# Altium PCB RobotBoardPcb.PcbDoc (part 1 of 2)
Units mm, origin at the board's own origin, x right, y up, seen from the top; angles counter-clockwise.
Board outline 64 x 85 mm, 4 copper layers (Top Layer, Ground Plane, Power Plane, Bottom Layer), stack 0.844 mm thick; 128 components, 94 nets, 395 pads, 170 vias.
Unrouted connection lines stored in the file: 5.
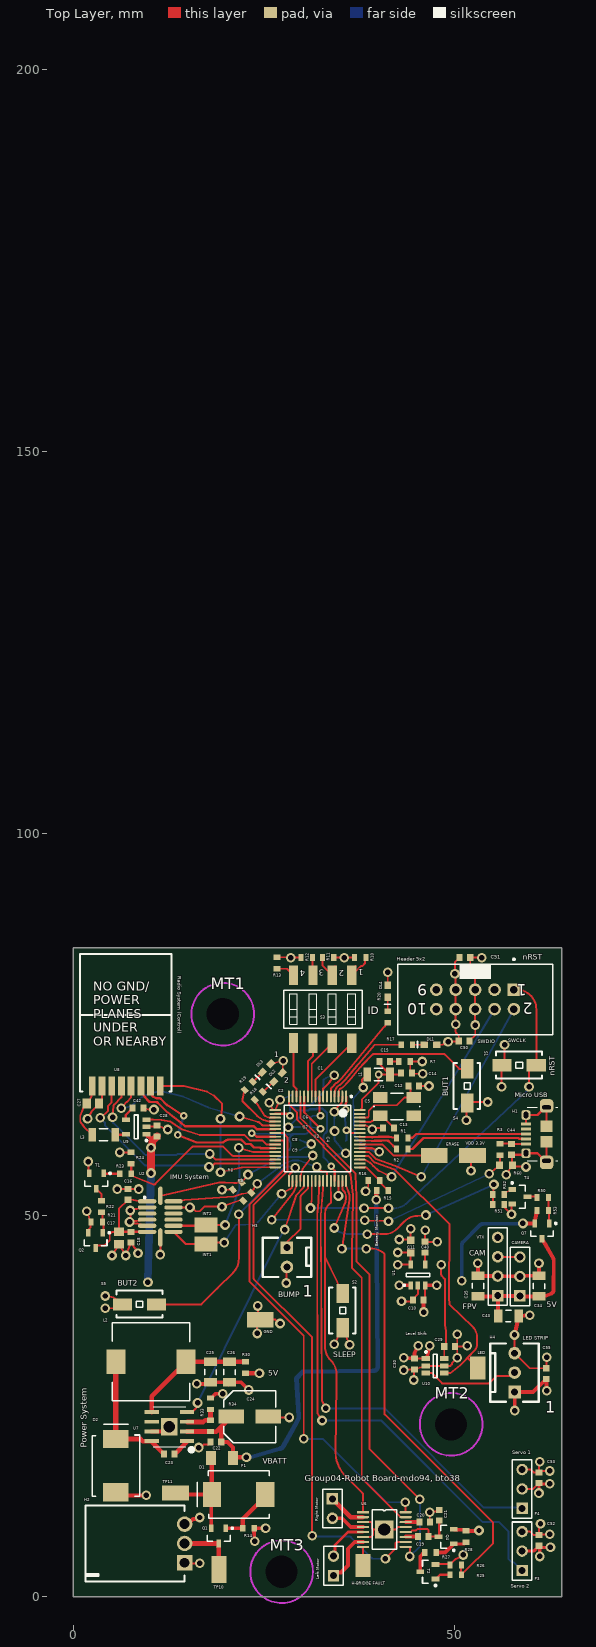
[diagram p0: Top Layer view]
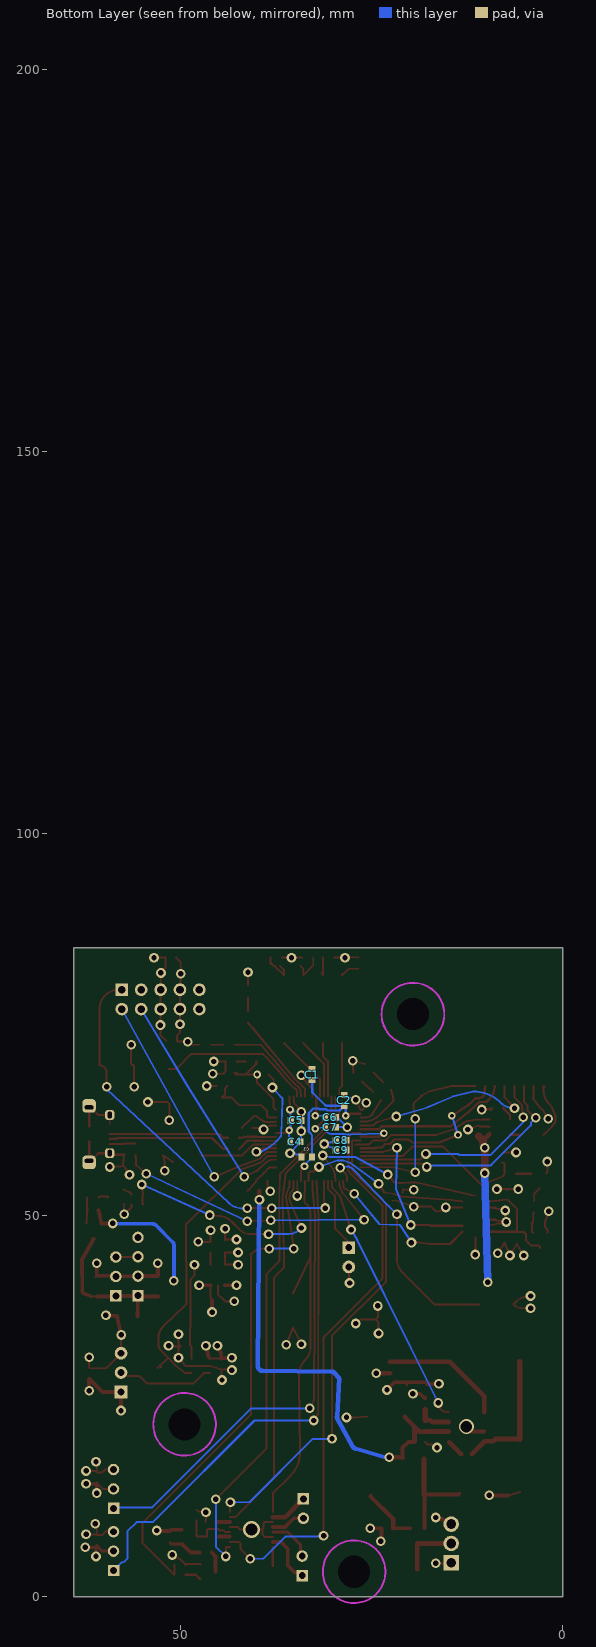
[diagram p1: Bottom Layer view, seen from below]
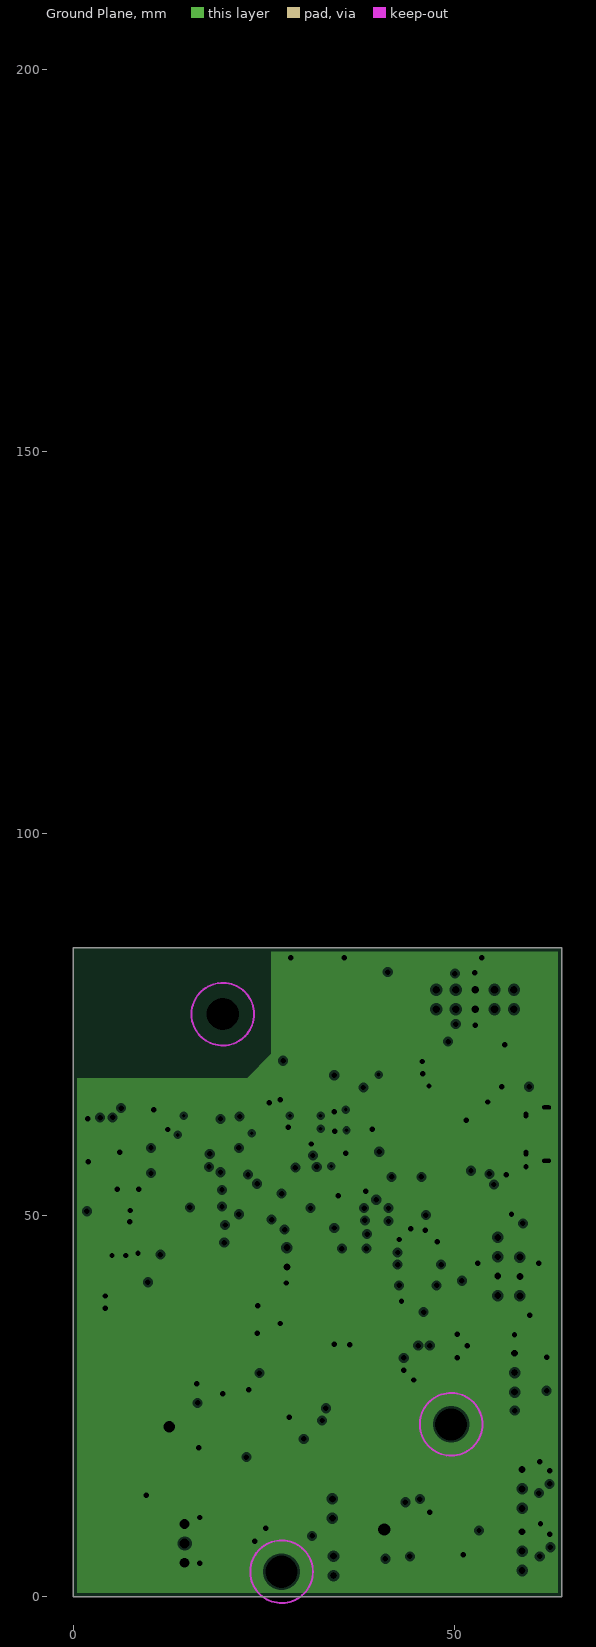
[diagram p2: Ground Plane, clearances drawn from the general rule]
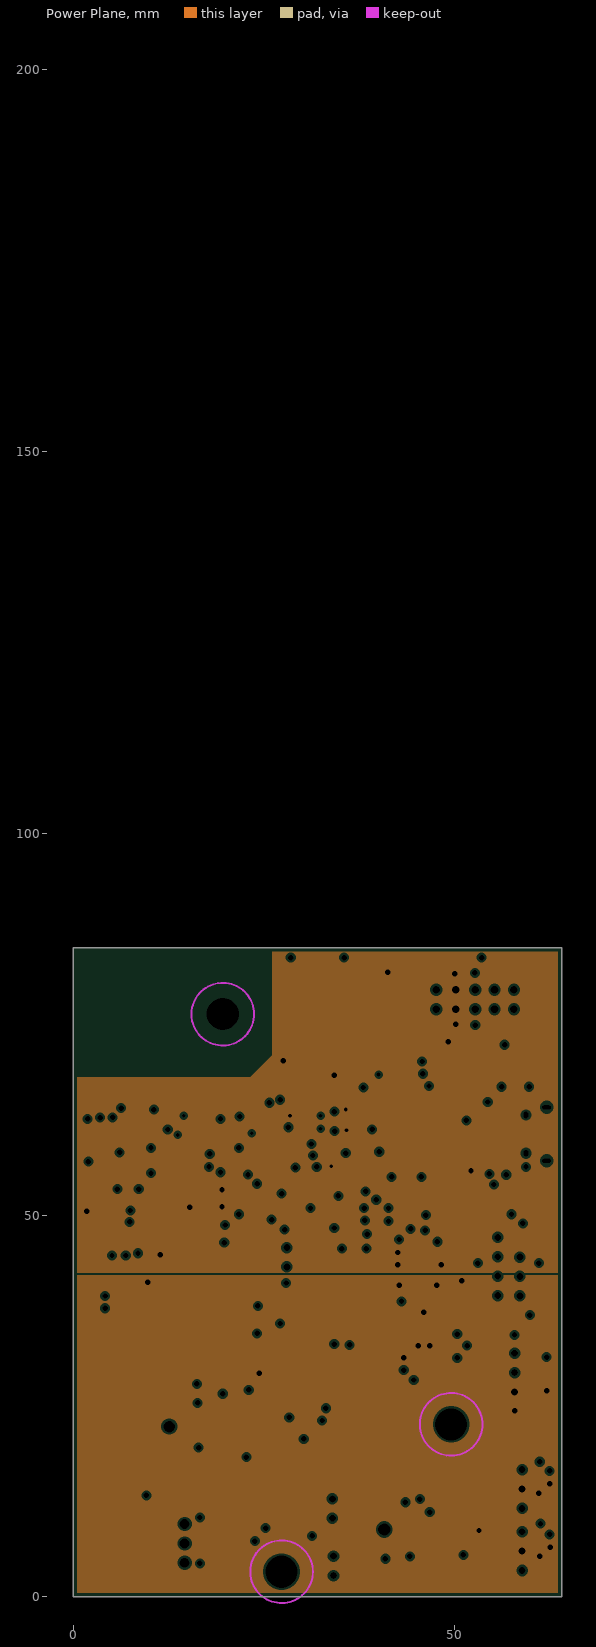
[diagram p3: Power Plane, clearances drawn from the general rule]

## Layer stack, top to bottom
Top Solder: solder mask 0.0102, Solder Resist, Dk 3.5
Top Layer: signal copper 0.0356
Dielectric 1: core 0.32, FR-4, Dk 4.8
Ground Plane: plane copper 0.036, net GND
Dielectric 3: prepreg 0.127, Dk 4.2
Power Plane: plane copper 0.036, net (Multiple Nets)
Dielectric 4: core 0.254, Dk 4.2
Bottom Layer: signal copper 0.0356
Bottom Solder: solder mask 0.0102, Solder Resist, Dk 3.5

## Board outline
0,85 64,85 64,0 0,0 0,85

## Design rules (kind name [scope] priority, off if disabled: settings)
BoardOutlineClearance [All] p1: gap=0.5 ignorepadtopadclearanceinfootprint=FALSE
Clearance GND_POLY [InNamedPolygon('GND')] p1: gap=0.254 ignorepadtopadclearanceinfootprint=FALSE
Clearance Min_Clearance_Circuit_Labs [All] p2: gap=0.2 ignorepadtopadclearanceinfootprint=FALSE
FanoutControl Fanout_BGA [IsBGA] p1 off: bgadir=Out bgaviamode=Centered fanoutstyle=Auto fanoutdirection=Alternating viagrid=0.025 // Fanout_BGA (Default Rule)
Height [All] p1: minheight=0 maxheight=50.8 prefheight=12.7
HoleSize [All] p1: absolutevalues=TRUE maxlimit=10 minlimit=0.3 maxpercent=80.000 minpercent=20.000
MinimumAnnularRing [All] p1: minimumring=0.1
MinimumSolderMaskSliver [All] p1: minsoldermaskwidth=0.102
NetAntennae [All] p1: netantennaetolerance=1
PlaneClearance [All] p1: clearance=0.305
PlaneConnect [All] p1: planeconnectstyle=Direct reliefexpansion=0.508 reliefentries=4 reliefconductorwidth=0.254 reliefairgap=0.254
PolygonConnect [All] p1: connectstyle=Relief reliefconductorwidth=0.254 reliefentries=4 polygonreliefangle="90 Angle" airgapwidth=0.254
RoutingVias [All] p1: holewidth=0.711 width=1.27 viastyle="Through Hole" minholewidth=0.711 minwidth=1.27 maxholewidth=0.711 maxwidth=1.27
SMDNeckDown [All] p1 off: percent=50.000
SMDToCorner [All] p1: distance=98425
SMDToPlane [All] p1: distance=1968504
SilkToSolderMaskClearance SilkscreenOverComponentPads [IsPad] p1: minsilkscreentomaskgap=0.2 clearancetoexposedcopper=TRUE
SolderMaskExpansion [All] p1: expansion=0.102 istentingtop=FALSE
ViasUnderSMD [All] p1: allowed=FALSE
Width [All] p1: maxlimit=0.254 minlimit=0.254 preferedwidth=0.254
22 further rules are at their usual default settings.

## Classes and differential pairs
component class U_RobotPower: C1 C2 C3 C4 C5 C6 C7 C8 C9 C10 C11 C14 C15 C22 C23 C24 C25 C26 C40 D1 D2 F1 H2 L1 L2 Q1 R7 R14 R30 R33 R34 TP10 TP11 U1 U7
component class RobotBoard: C12 C13 C16 C17 C18 C19 C20 C21 C27 C28 C29 C30 C34 C35 C42 C43 C44 C50 C51 C52 C53 C55 CAMERA DL1 DL3 DL4 ERASE GND H1 H3 H4 L3 LED "Left Motor" "Light 1" MT1 MT2 MT3 P3 P4 Q2 Q4 Q7 R1 R2 R3 R8 R9 R10 R11 R12 R13 R15 R16 R17 R19 R20 R21 R22 R23 R24 R25 R26 R27 R28 R50 R51 R52 R53 R60 "Right Motor" S1 S2 S3 S4 S5 T1 T2 T4 U3

## Components (designator, comment, footprint, x,y, rotation, side; value= is the part's Value field where it differs from the comment)
C1 "100nF" CAPC1608L 32.8,68.4 r270 bottom
C2 "100nF" CAPC1608L 28.6,65 r270 bottom
C3 "100nF" CAPC1608L 33.5,57.6 r180 bottom
C4 "100nF" CAPC1608L 35,59.6 r0 bottom
C5 "100nF" CAPC1608L 34.9,62.4 r0 bottom
C6 "100nF" CAPC1608L 30.4,62.8 r180 bottom
C7 "100nF" CAPC1608L 30.4,61.5 r180 bottom
C8 "100nF" CAPC1608L 29,59.8 r0 bottom
C9 "100nF" CAPC1608L 29,58.5 r0 bottom
C10 "1uF" CAPC1608L 45.2,38.9 r180 top
C11 "4.7uF" CAPC1608N 44.2,45.9 r90 top
C12 "27pF" CAPC1608L 44.6,66.9 r180 top
C13 "27pF" CAPC1608L 41.3,61.4 r0 top
C14 "100nF" CAPC1608L 43.654,68.6 r0 top
C15 "4.7nF" CAPC1608L 40.8,70.1 r0 top
C16 "100nF" CAPC1608L 7.2,52.7 r270 top
C17 "10uF" CAPC2012L 6,47 r90 top
C18 "1uF" CAPC1608L 7.6,47.1 r90 top
C19 "10nF" CAPC1608L 45.85,7.9 r0 top
C20 "2.2uF" CAPC1608L 46.05,9.8 r0 top
C21 "10uF" CAPC1608L 47.95,10.7 r270 top
C22 "10uF" CAPC1608L 18.7,20.3 r180 top
C23 "100nF" CAPC1608L 12.6,18.7 r180 top
C24 "100µF/25V" CAPAE6666X77M 23.125,23.6 r0 top
C25 "22uF" CAPC3216L 18,29.45 r270 top
C26 "22uF" CAPC3216L 20.5,29.45 r270 top
C27 "10uF" CAPC2012L 2.6,64.6 r180 top
C28 "1uF" CAPC1608L 11,61 r90 top
C29 "1uF" CAPC1608L 49.3,32.8 r180 top
C30 "1uF" CAPC1608L 44.7,30.5 r90 top
C34 "10uF" CAPC3216L 61,40.7 r270 top
C35 "0.22uF" CAPC3216L 53,40.7 r90 top value=10uF
C40 "10nF" CAPC1608L 46.1,45.8 r270 top value=100nF
C42 "10nF" CAPC1608L 8.5,64 r180 top
C43 "47uF" CAPC3216L 57,36.8 r180 top
C44 "4.7nF" CAPC1608L 57.4,58.6 r90 top
C50 "100nF" CAPC1608L 51.2,72.8 r180 top
C51 "100nF" CAPC1608L 51.3,83.7 r180 top
C52 "100nF" CAPC1608L 61,7.4 r270 top
C53 "100nF" CAPC1608L 61,15.6 r270 top
C55 "100nF" CAPC1608L 61.951,29.239 r270 top
CAMERA "JA_PIN_Header 3" HDR1X3 58.5,39.42 r90 top
D1 "VS-30BQ015-M3/9AT" SMC 21.675,13.4 r180 top
D2 "VS-30BQ015-M3/9AT" SMC 5.6,17.2 r90 top
DL1 "Red" WL-SMCW0603 46,72.3 r0 top
DL2 "Green" WL-SMCW0603 26.269,67.469 r45 top
DL3 "Red" WL-SMCW0603 24.769,68.669 r45 top
DL4 "Green" WL-SMCW0603 41.2,78.5 r90 top
ERASE "TP" TP_1206#1 50.9,57 r180 top (schematic designator TP2)
F1 "5A" RESC3216N 19.5,18.2 r0 top
GND "TP" TP_1206#2 42.9,34.1 r0 top
H1 "JS_USB_MICRO_B" FCI_USB_10118194-0001LF 63.45,60.6 r90 top
H2 "Battery_HEADER_3pin" BATT_HEADER_3POS 14.6,7 r90 top
H3 "2 Pin Molex KK HDR" MOLEX_KK_2_HDR 28,45.74 r270 top
H4 "3 Pin Molex KK Hdr" MOLEX_KK_3_HDR 57.818,26.828 r90 top
"H-BRIDGE FAULT" "TP_0805" TP_0805#1 37.95,4.1 r270 top (schematic designator TP3)
INT1 "TP_0805" TP_0805#1 17.4,46.2 r0 top (schematic designator TP7)
INT2 "TP_0805" TP_0805#1 17.4,48.7 r0 top (schematic designator TP8)
L1 "1A max, Idc 0.3R," INDC3216L 40,68.4 r0 top
L2 "IND 5.2UH 6A" INDUCTOR5u2 10.2,30.8 r0 top
L3 "1A max, Idc 0.3R," INDC3216L 4,60.5 r0 top
LED "TP_0805" TP_0805#2 52.6,30.1 r90 top (schematic designator TP6)
"Left Motor" "JA_PIN_Header 2" HDR1X2 34.1,2.8 r90 top (schematic designator P2)
MT1 "M4.2 NPTH" MNT-HOLE_4.2mm_NPTH 19.6,76.3 r0 top
MT2 "M4.2 NPTH" MNT-HOLE_4.2mm_NPTH 49.5,22.6 r0 top
MT3 "M4.2 NPTH" MNT-HOLE_4.2mm_NPTH 27.3,3.3 r0 top
P3 "JA_PIN_Header 3" HDR1X3 58.8,3.46 r90 top
P4 "JA_PIN_Header 3" HDR1X3 58.8,11.6 r90 top
Q1 "SSM3J328R,LF" SOT23_L 19.05,8 r270 top
Q2 "SSM3J328R,LF" SOT23_L 2.944,46.688 r270 top
Q4 "SSM3J328R,LF" SOT23_L 48.85,7.9 r180 top
Q7 "SSM3J328R,LF" SOT23_L 61.4,47.9 r270 top
R1 "27R" RESC1608L 43.1,60.109 r180 top
R2 "27R" RESC1608L 43.1,58.654 r180 top
R3 "27K" RESC1608L 55.9,58.6 r270 top
R7 "1R" RESC1608L 43.4,70.1 r0 top
R8 "4K7" RESC1608L 21.5,53.8 r220 top
R9 "4K7" RESC1608L 22.8,52.4 r225 top
R10 "10K" RESC1608L 37.6,83.7 r0 top
R11 "10K" RESC1608L 33.4,83.7 r180 top
R12 "10K" RESC1608L 30.6,83.7 r0 top
R13 "10K" RESC1608L 26.7,83 r270 top
R14 "100K" RESC1608L 22.95,9 r0 top
R15 "100K" RESC1608L 40.5,53.2 r180 top
R16 "100K" RESC1608L 39.4,54.5 r0 top
R17 "3K3" RESC1608L 43.7,72.3 r180 top
R18 "2K" RESC1608L 24.3,65.6 r225 top
R19 "3K3" RESC1608L 23,66.9 r225 top
R20 "2K" RESC1608L 41.2,75.95 r270 top
R21 "10K" RESC1608L 3.097,49.096 r0 top
R22 "0R" RESC1608L 3.715,51.107 r90 top
R23 "1K" RESC1608L 6.85,55.4 r180 top
R24 "10K" RESC1608L 7.6,57.45 r90 top
R25 "1K" RESC1608L 50.1,2.9 r180 top
R26 "10K" RESC1608L 50.1,4.2 r180 top
R27 "0R" RESC1608L 46.8,5.8 r180 top
R28 "10K" RESC1608L 51.45,7.9 r270 top
R30 "0R" RESC1608L 22.6,30.05 r270 top
R33 "100K" RESC1608L 18,22.4 r90 top
R34 "33K" RESC1608L 18,25.3 r90 top
R50 "0R" RESC1608L 61.5,52.3 r180 top
R51 "10K" RESC1608L 55.7,51.4 r0 top
R52 "1K" RESC1608L 55.7,52.7 r0 top
R53 "10K" RESC1608L 61.5,50.6 r0 top
R60 "47K" RESC1608N 56.7,56.5 r0 top (schematic designator R4)
"Right Motor" "JA_PIN_Header 2" HDR1X2 33.95,12.84 r270 top (schematic designator P1)
S1 "EVQPNF05M" EVQPNF05M 58.4,69.6 r0 top
S2 "EVQPNF05M" EVQPNF05M 35.3,37.5 r90 top
S3 "WS_SW DIP-4" "DIP_SW_4WAY_SMD -" 36.48,81.4 r180 top
S4 "EVQPNF05M" EVQPNF05M 51.6,66.9 r90 top
S5 "EVQPNF05M" EVQPNF05M 8.7,38.3 r0 top
T1 "BSH105,215" SOT23_L 3.047,54.457 r270 top
T2 "BSH105,215" SOT23_L 46.45,3.296 r180 top
T4 "BSH105,215" SOT23_L 58.5,52.4 r0 top
TP10 "TP" TP_1206#3 19.1,3.6 r90 top
TP11 "TP" TP_1206#3 13.4,13.6 r0 top
U1 "CAT6219-330TDGT3" SOT95P280X145-5N 45.15,42.15 r90 top
U2 "ADXL345BCCZ" ADI-CC-14-1_V 11.425,49.8 r0 top
U3 "ATSAM4S8BA-ANR" LQFP64_L 32,60 r270 top locked
U6 "DRV8833" "HTSOP16 DRV8833" 37.95,11.1 r0 top locked
U7 "ADP2302ARDZ-5.0 BUCK" RD_8_1 12.6,22.3 r180 top locked value=Value
U8 "nRF24 SMD" NRF24 0.914,66.2 r0 top
U9 "CAT6219-330TDGT3" SOT95P280X145-5N 8.25,61.55 r180 top
U10 "SN74LVC1T45" SOT23-6_N 47.4,30.25 r0 top
"VDD 3.3V" "TP" TP_1206#4 51.5,47.7 r180 top (schematic designator TP1)
VTX "JA_PIN_Header 4" HDR1X4 55.6,39.46 r90 top
Y1 "12MHz" 6.0X3.5-4 42.4,64.2 r180 top
? "Header 5X2 Vert" IDC2.54-V10D 52.64,78.23 r180 top

## Footprints (in the part's own frame and the unit in brackets; to place one, negate y for a bottom-side part, rotate by r counter-clockwise, add the part's x,y. Pads: shape width x height; smd on the part's side, far side on the other; paste and mask are expansions set on the pad)
6.0X3.5-4 [mm] "4 SMD 6.0X3.5 mm No Lead Crystal"
  rect 1.9x1.4 smd: 1(-2.2,-1.2) 2(2.2,-1.2) 3(2.2,1.2) 4(-2.2,1.2)
  silkscreen extent -3,-1.75 3,1.75, body extent -3,-1.75 3,1.75, height 1.2
ADI-CC-14-1_V [mm]
  oval 2.4x0.55 smd: 1(-1.725,2) 2(-1.725,1.2) 3(-1.725,0.4) 4(-1.725,-0.4) 5(-1.725,-1.2) 6(-1.725,-2) 8(1.725,-2) 9(1.725,-1.2) 10(1.725,-0.4) 11(1.725,0.4) 12(1.725,1.2) 13(1.725,2)
  oval 0.55x2.4 smd: 7(0,-2.725) 14(0,2.725)
  silkscreen extent -2.18,2.38 -1.93,2.62, body extent -1.5,-2.5 1.5,2.5, height 1
BATT_HEADER_3POS [mil]
  rect 80x80 hole 50: 1(-100,0)
  round 80 hole 50: 2(0,0) 3(100,0)
  silkscreen extent -197,0 197,512, body extent -197,-31 200,504, height 294
CAPAE6666X77M [mm] "Aluminum Electrolytic Capacitor, Body 6.60x6.60x7.70mm, IPC Low Density"
  rect 3.3x1.85 smd: 1(2.425,0) 2(-2.425,0)
  silkscreen extent -3.4,-3.4 3.4,3.4, body extent -3.4,-3.4 3.4,3.4, height 7.7
CAPC1608L [mm] "Chip Capacitor, Body 1.6x0.8mm, IPC High Density"
  rect 0.8x0.9 smd: 1(-0.7,0) 2(0.7,0)
  body extent -0.87,-0.48 0.87,0.48, height 0.85
CAPC1608N [mm] "Chip Capacitor, Body 1.6x0.8mm, IPC Medium Density"
  rect 1x1 smd: 1(-0.8,0) 2(0.8,0)
  body extent -0.87,-0.48 0.87,0.48, height 0.85
CAPC2012L [mm] "Chip Capacitor, Body 2.0x1.3mm, IPC High Density"
  rect 1.1x1.3 smd: 1(-0.8,0) 2(0.8,0)
  body extent -1.1,-0.72 1.1,0.72, height 1.1
CAPC3216L [mm] "Chip Capacitor, Body 3.2x1.6mm, IPC High Density"
  rect 1.1x1.7 smd: 1(-1.35,0) 2(1.35,0)
  silkscreen extent -0.35,-0.75 0.35,0.75, body extent -1.7,-0.9 1.7,0.9, height 1.35
"DIP_SW_4WAY_SMD -" [mm] "DIP Switch; 8 Leads"
  rect 1.2x2.6 smd: 1(0,0) 2(2.54,0) 3(5.08,0) 4(7.62,0) 5(7.62,8.89) 6(5.08,8.9) 7(2.54,8.9) 8(0,8.9)
  silkscreen extent -1.4,1.95 8.9,6.95
EVQPNF05M [mm] "Panansonic light touch SMD push button switch"
  rect 2.5x1.6 smd: 1(-2.25,0) 2(2.25,0)
  silkscreen extent -3,-1.7 3,1.8, body extent -3,-1.7 3,1.8, height 5
FCI_USB_10118194-0001LF [mm] "Micro USB B Type Receptacle"
  rect 0.4x1.35 smd mask+0.07: 1(-1.3,4.15) 2(-0.65,4.15) 3(0,4.15) 4(0.65,4.15) 5(1.3,4.15)
  rrect50% 1.75x1.75 hole 0.5 slot 1.15 at 90 deg copper offset -0.2,0 paste-2539.97 mask+0.1: 6(-3.5,1.45)
  rrect50% 1.25x1.2 hole 0.55 slot 0.85 at 0 deg: 6(-2.5,4.15) 6(2.5,4.15)
  rect 1.5x1.55 smd: 6(-1,1.45) 6(1,1.45)
  rrect50% 1.75x1.75 hole 0.5 slot 1.15 at 90 deg copper offset 0.2,0 paste-2539.97 mask+0.1: 6(3.5,1.45)
  silkscreen extent -3.5,0 3.5,4
HDR1X2 [mm] "Connector; Header; 2 Position"
  rect 1.5x1.5 hole 0.9: 1(0,0)
  round 1.5 hole 0.9: 2(2.54,0)
  silkscreen extent -1.27,-1.27 3.81,1.27, body extent -1.25,-1.25 3.79,1.25, height 8.54
HDR1X3 [mm] "Connector; Header; 3 Position"
  rect 1.5x1.5 hole 0.9: 1(0,0)
  round 1.5 hole 0.9: 2(2.54,0) 3(5.08,0)
  silkscreen extent -1.27,-1.27 6.35,1.27, body extent -1.27,-1.27 6.35,1.27, height 8.89
HDR1X4 [mm] "Connector; Header; 4 Position"
  rect 1.5x1.5 hole 0.9: 1(0,0)
  round 1.5 hole 0.9: 2(2.54,0) 3(5.08,0) 4(7.62,0)
  silkscreen extent -1.27,-1.27 8.89,1.27, body extent -1.26,-1.3 8.86,1.2, height 2.1
"HTSOP16 DRV8833" [mm]
  rect 1.6x0.3 smd: 1(0,0)
  oval 1.6x0.3 smd: 2(0,-0.65) 3(0,-1.3) 4(0,-1.95) 5(0,-2.6) 6(0,-3.25) 7(0,-3.9) 8(0,-4.55) 9(5.6,-4.55) 10(5.6,-3.9) 11(5.6,-3.25) 12(5.6,-2.6) 13(5.6,-1.95) 14(5.6,-1.3) 15(5.6,-0.65) 16(5.6,0)
  rect 2.4x2.4 smd: 17(2.8,-2.275)
  silkscreen extent 1.2,-4.88 4.4,0.33, body extent -0.4,-4.77 6,0.23, height 1.13
IDC2.54-V10D [mm] "Connector; IDC, Low Profile Male Header, Thru-Hole; 10 Position; Vertical; Pitch 2.54 mm; Body 20.32 x 9.2 x 9.45 mm (LxWxH)"
  rect 1.65x1.65 hole 1: 1(-5.08,-1.27)
  round 1.65 hole 1: 2(-5.08,1.27) 3(-2.54,-1.27) 4(-2.54,1.27) 5(0,-1.27) 6(0,1.27) 7(2.54,-1.27) 8(2.54,1.27) 9(5.08,-1.27) 10(5.08,1.27)
  silkscreen extent -10.16,-5.37 10.16,4.6, body extent -10.16,-4.6 10.16,4.6, height 9.45
INDC3216L [mm] "Chip Inductor, Body 3.2x1.6mm, IPC High Density"
  rect 1x1.8 smd: 1(-1.5,0) 2(1.5,0)
  silkscreen extent -0.55,-0.8 0.55,0.8, body extent -1.75,-0.95 1.75,0.95, height 1.9
INDUCTOR5u2 [mm]
  rect 2.5x3.2 smd: 1(-4.6,0) 2(4.6,0)
  silkscreen extent -5.1,-5.1 5.1,5.1, body extent -5,-5 5,5, height 3.8
LQFP64_L [mm] "Thin QFP, 64-Leads, Body 10x10mm, Pitch 0.5mm, IPC High Density"
  oval 1.55x0.25 smd mask+0.07: 1(-5.525,3.75) 2(-5.525,3.25) 3(-5.525,2.75) 4(-5.525,2.25) 5(-5.525,1.75) 6(-5.525,1.25) 7(-5.525,0.75) 8(-5.525,0.25) 9(-5.525,-0.25) 10(-5.525,-0.75) 11(-5.525,-1.25) 12(-5.525,-1.75) 13(-5.525,-2.25) 14(-5.525,-2.75) 15(-5.525,-3.25) 16(-5.525,-3.75) 33(5.525,-3.75) 34(5.525,-3.25) 35(5.525,-2.75) 36(5.525,-2.25) 37(5.525,-1.75) 38(5.525,-1.25) 39(5.525,-0.75) 40(5.525,-0.25) 41(5.525,0.25) 42(5.525,0.75) 43(5.525,1.25) 44(5.525,1.75) 45(5.525,2.25) 46(5.525,2.75) 47(5.525,3.25) 48(5.525,3.75)
  oval 0.25x1.55 smd mask+0.07: 17(-3.75,-5.525) 18(-3.25,-5.525) 19(-2.75,-5.525) 20(-2.25,-5.525) 21(-1.75,-5.525) 22(-1.25,-5.525) 23(-0.75,-5.525) 24(-0.25,-5.525) 25(0.25,-5.525) 26(0.75,-5.525) 27(1.25,-5.525) 28(1.75,-5.525) 29(2.25,-5.525) 30(2.75,-5.525) 31(3.25,-5.525) 32(3.75,-5.525) 49(3.75,5.525) 50(3.25,5.525) 51(2.75,5.525) 52(2.25,5.525) 53(1.75,5.525) 54(1.25,5.525) 55(0.75,5.525) 56(0.25,5.525) 57(-0.25,5.525) 58(-0.75,5.525) 59(-1.25,5.525) 60(-1.75,5.525) 61(-2.25,5.525) 62(-2.75,5.525) 63(-3.25,5.525) 64(-3.75,5.525)
  silkscreen extent -5.65,-4.35 4.35,4.55, body extent -5,-5 5,5, height 1.6
MNT-HOLE_4.2mm_NPTH [mm] "Mounting Hole 4.2mm non plated"
  round 0 hole 4.2 unplated: 1(0,0)
  Keep-Out Layer circle w0.254: c0,0 r4.1
MOLEX_KK_2_HDR [mil] "MOLEX_KK_2_HDR"
  rect 65x65 hole 35.43: 1(0,0)
  round 65 hole 35.43: 2(100,0)
  silkscreen extent -50,-125 152,125, body extent -42,-124 152,126, height 420
MOLEX_KK_3_HDR [mil] "MOLEX_KK_3_HDR"
  rect 65x65 hole 35.43: 1(0,0)
  round 65 hole 35.43: 2(100,0) 3(200,0)
  silkscreen extent -50,-125 250,125, body extent -50,-114 250,114, height 461
NRF24 [mm]
  rect 0.9x2.5 smd: 1(1.6,0.7) 2(2.871,0.7) 3(4.143,0.7) 4(5.414,0.7) 5(6.686,0.7) 6(7.957,0.7) 7(9.229,0.7) 8(10.5,0.7)
  silkscreen extent 0,0 12,18, body extent 0,0 12,18, height 2.27
RD_8_1 [mil]
  rect 74x20 smd paste+0 mask+0: 1(-91,75) 2(-91,25) 3(-91,-25) 4(-91,-75) 5(91,-75) 6(91,-25) 7(91,25) 8(91,75)
  rect 84.65x90 smd paste-44.5 mask+0: EPAD(0,0)
  silkscreen extent -118,-104 84,123, body extent 0,0 10,10, height 10
RESC1608L [mm] "Chip Resistor, Body 1.6x0.8mm, IPC High Density"
  rect 0.7x0.9 smd: 1(-0.75,0) 2(0.75,0)
  body extent -0.85,-0.48 0.85,0.48, height 0.9
RESC1608N [mm] "Chip Resistor, Body 1.6x0.8mm, IPC Medium Density"
  rect 0.9x1 smd: 1(-0.85,0) 2(0.85,0)
  body extent -0.85,-0.48 0.85,0.48, height 0.6
RESC3216N [mm] "Chip Resistor, Body 3.2x1.6mm, IPC Medium Density"
  rect 1.3x1.8 smd: 1(-1.45,0) 2(1.45,0)
  body extent -1.68,-0.87 1.68,0.87, height 0.71
SMC [mm] "DO-214-AB/SMC; 2 C-Bend Leads; Body 7.9 x 5.9 mm, inc. leads (LxW)"
  rect 2.4x3.3 smd: 1(-3.475,0) 2(3.475,0)
  silkscreen extent -4,-3.1 5.43,3.1
SOT23-6_N [mm]
  rect 1.1x0.65 smd: 1(-1.2,0.95) 2(-1.2,0) 3(-1.2,-0.95) 4(1.2,-0.95) 5(1.2,0) 6(1.2,0.95)
  silkscreen extent -1.32,-1.55 0.25,1.95, body extent -0.9,-1.55 0.9,1.55, height 1.45
SOT23_L [mm] "SOT23, 3-Leads, Body 2.9x1.3mm, Pitch 0.95mm, Lead Span 2.3mm, IPC High Density"
  rect 1x0.6 smd: 1(-1,0.95) 2(-1,-0.95) 3(1,0)
  silkscreen extent -1.12,-1.5 0.7,1.93, body extent -0.7,-1.5 0.7,1.5, height 1.1
SOT95P280X145-5N [mm] "SOT23, 5-Leads, Body 2.90x2.80mm, Pitch 0.95mm, IPC Medium Density"
  rect 1.05x0.6 smd: 1(-1.35,0.95) 2(-1.35,0) 3(-1.35,-0.95) 4(1.35,-0.95) 5(1.35,0.95)
  silkscreen extent -1.47,-1.55 0.25,1.92, body extent -0.87,-1.52 0.87,1.53, height 1.45
TP_0805#1 [mm] "TestPoint SMD"
  rect 3x2 smd: 1(0,0)
  body extent -1.5,-1 1.5,1.1, height 1.4
TP_0805#2 [mm] "TestPoint SMD"
  rect 3x2 smd: 1(-0.1,-0.4)
  body extent -1.5,-1 1.5,1.1, height 1.4
TP_1206#1 [mm] "Test Point Pad"
  rect 3.5x2 smd: 1(3.6,-0.8)
  body extent -1.62,-0.85 1.63,0.8, height 2
TP_1206#2 [mm] "Test Point Pad"
  rect 3.5x2 smd: 1(-18.4,2.2)
  body extent -1.62,-0.85 1.63,0.8, height 2
TP_1206#3 [mm] "Test Point Pad"
  rect 3.5x2 smd: 1(0,0)
  body extent -1.62,-0.85 1.63,0.8, height 2
TP_1206#4 [mm] "Test Point Pad"
  rect 3.5x2 smd: 1(-0.8,-10.1)
  body extent -1.62,-0.85 1.63,0.8, height 2
WL-SMCW0603 [mm] "2.4 x 0.8 x 0.7mm LED"
  rect 1x0.8 smd: 1(0,0) 2(1.6,0)
  silkscreen extent -0.9,-0.4 -0.9,0.4

## Part data
C1 C2 C3 C4 C5 C6 C7 C8 C9 C14 C16 C23 C50 C51 C52 C53 C55: library part CC_100nF_0603, "CAP CER 100nF X7R +-10% 50V 0603", Code_IPC="1608 [0603]", PackageReference=0603, Storage Location="PCB Assembly WS", Supplier="ECE Dept"
C10 C18 C28 C29 C30: library part CC_1uF_0603, "CAP CER 1uF Y5V -20% +80% 16V 0603", Max Voltage=16V, Code_IPC="1608 [0603]", PackageReference=0603, Storage Location="PCB Assembly WS", Supplier="ECE Dept"
C11: library part CC_4.7uF_0603, "CAP CER 4.7uF X5R +-20%  10V 0603", Max Voltage=10V, Code_IPC=2012[0805], Note="Footprint corresponds to dimensions for bulk cassette packaging. This case size has tightened tolerances.", PackageReference=0805, Storage Location="PCB Assembly WS", Supplier="ECE Dept"
C12 C13: library part CC_27pF_0603, "CAP CER 27pF NPO/COG +-5% 50V 0603", Code_IPC="1608 [0603]", PackageReference=0603, Storage Location="PCB Assembly WS", Supplier="ECE Dept"
C15 C44: library part CC_4.7nF_0603, "CAP CER 4.7nF X7R +-10% 50V 0603", Code_IPC="1608 [0603]", PackageReference=0603, Storage Location="PCB Assembly WS", Supplier="ECE Dept"
C17 C27: library part CC_10uF_0805_16V, "CAP CER 10uF X5R 16V 0805", Manufacturer="Samsung Electro-Mechanics", Manufacturer Part Number=CL21A106KOQNNWE, Max Voltage=16V, Operating Temperature="-55°C ~ 85°C", Package / Case="0805 (2012 Metric)", Ratings=-, Supplier Part Number 1=1276-2894-1-ND, Temperature Coefficient=X5R, Tolerance=±10%, Applications="General Purpose", Category=Capacitors, Code_IPC=2012[0805], ComponentLink1Description=http://www.samsungsem.com/kr/support/product-search/mlcc/CL21A106KOQNNWE.jsp, ComponentLink1URL=http://www.samsungsem.com/kr/support/product-search/mlcc/CL21A106KOQNNWE.jsp, Features=-, Height - Seated (Max)=-, Lead Spacing=-, Lead Style=-, Mounting Type="Surface Mount, MLCC", Note="Footprint corresponds to dimensions for bulk cassette packaging. This case size has tightened tolerances.", Notification="Current market demand for these product types have resulted in fluctuating and extending lead times. Lead times may differ.", PackageReference=0805, Packaging="Cut Tape (CT)", Part Status=Active, Pricing 1="1=0.35, 10=0.25, 100=0.1178, 500=0.08254, 1000=0.06831 (NZD)", RoHS="RoHS Compliant", Size / Dimension="0.079\" L x 0.049\" W (2.00mm x 1.25mm)", Stock 1=20000, Supplier 1=Digi-Key, Thickness (Max)="0.055\" (1.40mm)", Voltage - Rated=16V
C19 C40 C42: library part CC_10nF_0603, "CAP CER 10nF X7R +-10% 50V 0603", Code_IPC="1608 [0603]", PackageReference=0603, Storage Location="PCB Assembly WS", Supplier="ECE Dept"
C20: library part CC_2.2uF_0603, "CAP CER 2.2uF X5R +-20% 10V 0603", Max Voltage=10V, Code_IPC="1608 [0603]", PackageReference=0603, Storage Location="PCB Assembly WS", Supplier="ECE Dept"
C21 C22: library part CC_10uF_0603, "CAP CER 10UF X5R +-20% 6V3 0603", Voltage - Rated=6.3V, Storage Location="PCB Assembly WS", Supplier="ECE Dept"
C24: library part CA_100uF_25V, "CAP ALUM 100UF 25V 20% SMD", Manufacturer=Nichicon, Manufacturer Part Number=UWT1E101MCL1GS, Operating Temperature="-55°C ~ 105°C", Package / Case="Radial, Can - SMD", Ripple Current=91mA, Supplier Part Number 1=493-2190-1-ND, Capacitance=100µF/25V, Height - Seated (Max)="0.303\" (7.70mm)", Mounting Type="Surface Mount", Size / Dimension="0.248\" Dia (6.30mm)", Supplier 1=Digi-Key
C25 C26: library part CC_22uF_1206, "CAP CER 22uF Y5V -20% +80% 10V 1206", Dielectric=Y5V, Max Voltage=10V, Storage Location="PCB Assembly WS", Supplier="ECE Dept"
C34 C35: library part CC_47uF_1206, "CAP CER 47uF X5R -/+20% 10V 1206", Dielectric=X5R, MoV=10V, Storage Location="PCB Assembly WS", Supplier="ECE Dept"
C43: library part CC_47uF_1206, "CAP CER 47uF X5R -/+20% 10V 1206", Dielectric=X5R, Max Voltage=10V, MoV=10V, Storage Location="PCB Assembly WS", Supplier="ECE Dept"
CAMERA P3 P4: "Header, 3-Pin", LatestRevisionDate=17-Jul-2002, LatestRevisionNote="Re-released for DXP Platform.", Publisher="Altium Limited"
D1 D2: library part DS_VS-30BQ015-M3, "DIODE, SCHOTTKY, 3A, 15V, DO-214AB / SMC", Average Rectified Current=3A, Forward Voltage=350mV, Manufacturer="Vishay Semiconductors", Max Forward Surge Current (Ifsm)=650A, Max Reverse Voltage (DC)=15V, Peak Reverse Current=4mA, Supplier Part Number=VS-30BQ015-M3/9AT-ND, Supplier Part Number 1=VS-30BQ015-M3/9ATGIDKR-ND, ComponentLink1Description=https://datasheet.ciiva.com/36181/vs-30bq015-m3-9at-36181258.pdf, ComponentLink1URL=https://datasheet.ciiva.com/36181/vs-30bq015-m3-9at-36181258.pdf, Manufacturer Part Number=VS-30BQ015-M3/9AT, Supplier=Digi-Key, Supplier 1=Digi-Key, Supplier 2=Element14, Supplier Part Number 2=2628288
DL1 DL3: library part DL_150060RS75000, "LED Red 250mcd 0603 SMD", Forward Current If=30, Forward Voltage=2, Manufacturer="WURTH ELEKTRONIK", Manufacturer Part Number=150060RS75000, Supplier Part Number 1=2322071, LED Colour=Red, LED Mounting=SMD, Lens Shape=Rectangular, Luminous Intensity=250, Storage Location="PCB Assembly WS", Supplier="ECE Dept", Supplier 1=Farnell, Viewing Angle=140°, Wavelength Typ=625
DL2 DL4: library part DL_150060GS75000, "LED Green 430mcd 0603 SMD", Forward Current If=30, Forward Voltage=3.2, Manufacturer="WURTH ELEKTRONIK", Manufacturer Part Number=150060GS75000, Supplier Part Number 1=2322070, LED Colour=Green, LED Mounting=SMD, Lens Shape=Rectangular, Luminous Intensity=430, Storage Location="PCB Assembly WS", Supplier="ECE Dept", Supplier 1=Farnell, Viewing Angle=140°, Wavelength Typ=520
ERASE GND TP10 TP11 "VDD 3.3V": library part TP_1206, "Test-Point 3.3x1.6x2.1mm SMD", Manufacturer="Harwin Inc", Manufacturer Part Number=S1751-46R, Supplier Part Number 1=952-1478-2-ND, Mounting Type="Surface Mount", Storage Location=ProtoPlace, Supplier="ECE Dept", Supplier 1=Digi-Key, Supplier 2=Farnell, Supplier Part Number 2=1826282, Type="PC Test Point"
F1: library part FS_Fuse_5.0A, "Fuse 5.0A Fast Acting 1206 SMD", Case Code (Imperial)=1206, Case Code (Metric)=3216, DC Cold Resistance=19mR, Manufacturer="Bel TRP", Manufacturer Part Number=C1F5, Max Operating Temperature=125°C, Min Operating Temperature=-55°C, Supplier Part Number 1=507-1886-1-ND, Voltage Rating=125V, Voltage Rating (DC)=63V, Approvals=CE,cURus, Case/Package=1206, ComponentLink1Description=http://www.farnell.com/datasheets/2571625.pdf, ComponentLink1URL=http://www.farnell.com/datasheets/2571625.pdf, ComponentLink2Description=http://belfuse.com/pdfs/C1F.pdf, ComponentLink2URL=http://belfuse.com/pdfs/C1F.pdf, ComponentLink3Description=http://www.mouser.com/ds/2/643/C1F-594910.pdf, ComponentLink3URL=http://www.mouser.com/ds/2/643/C1F-594910.pdf, ComponentLink4Description=https://belfuse.com/resources/StewartConnector/C1F.pdf, ComponentLink4URL=https://belfuse.com/resources/StewartConnector/C1F.pdf, Contact Plating=Nickel,Tin, Current Rating=5A, Fuse Type="Board Mount (Cartridge Style Excluded)", Length=0.126inch, Mount="Surface Mount", Number of Pins=2, Packaging="Tape and Reel", Pricing 1="1=0.32, 5=0.312, 10=0.298, 50=0.2662, 100=0.2479, 250=0.22032, 500=0.1836, 1000=0.17442 (USD)", Stock 1=725, Supplier 1=Digi-Key, Supplier 2=Element14, Supplier Part Number 2=2848595, Voltage Rating (AC)=125V, Width=0.062inch
H1: library part JS_USB_MICRO_B_SMT, "CONN USB MICRO B RECPT SMT R/A", Manufacturer=FCI, Manufacturer Part Number=10118194-0001LF, Supplier Part Number 1=609-4618-1-ND, Features="Shielded, Solder Retention", Gender=Receptacle, Mounting Type="Surface Mount, Right Angle, Horizontal", Number of Contacts=5, Specifications="USB 2.0", Supplier 1=Digi-Key
H2: "3Pin Header 2.54mm spacing / Digikey #WM22663-ND", Supplier Part Number 1=WM22663-ND, Supplier 1=Digi-Key
H3: library part JA_MOLEX_KK_2POS, "CONN HEADER 2POS 2.54mm VERT_Thru Hole", Supplier Part Number 1=1462926, Storage Location="ECE Dept Store", Supplier="ECE Dept", Supplier 1=Farnell
H4: library part LED_Strip_Header, "CONN HEADER 3POS 2.54mm VERT_Thru Hole", Manufacturer=Molex, Manufacturer PN=22-23-2031, Supplier Part Number 1=9731156, Storage Location="ECE Dept Store", Supplier="ECE Dept", Supplier 1=Farnell
"H-BRIDGE FAULT" INT1 INT2 LED: "Test Point 2.0X0.9X1.2mm SMD", Manufacturer="TE Connectivity AMP Connectors", Manufacturer Part Number=1625854-2, Supplier Part Number 1=A106144CT-ND, Mounting Type="Surface Mount", Supplier 1=Digi-Key, Terminal="0.079\" x 0.049\" x 0.057\" (2.00mm x 1.25mm x 1.45mm)", Type="PC Test Point"
L1 L3: library part IN_Ferrite-Bead, "Ferrite Bead, Rdc 0.3R, Z100MHZ 600R, Imax 1A, SMD 1206", DC Current Rating=1, DC Resistance Max=0.08, Ferrite Case Style="1206 ^3216 Metric]", Frequency Range="50MHz to 1", Impedance Tolerance="± 25%", Manufacturer=FAIR-RITE, Manufacturer Part Number=2512066017Y1, Supplier Part Number 1=1612060, Ferrite Mounting=SMD, Impedance=600, Manufacturer PN=2512066017Y1, Storage Location="PCB Assembly WS", Supplier="ECE Dept", Supplier 1=Farnell
L2: library part CDRH104RNP-5R2NC, "FIXED IND 5.2UH 6A 22 MOHM SMD", Current - Saturation=5.6A, DC Resistance (DCR)="22 mOhm Max", Frequency - Self Resonant=-, Manufacturer="Sumida America Components Inc.", Operating Temperature="-40°C ~ 100°C", Package / Case=Nonstandard, Supplier Part Number 1=308-2280-1-ND, Tolerance=±30%, Category="Inductors, Coils, Chokes", ComponentLink1Description=http://products.sumida.com/products/pdf/CDRH104R.pdf, ComponentLink1URL=http://products.sumida.com/products/pdf/CDRH104R.pdf, Height - Seated (Max)="0.157\" (4.00mm)", Manufacturer Part Number=CDRH104RNP-5R2NC, Material - Core=Ferrite, Mounting Type="Surface Mount", Packaging="Cut Tape (CT)", Part Status=Active, Pricing 1="1=2.9, 10=2.678, 100=1.8743, 500=1.5173 (NZD)", Q @ Freq=-, Ratings=-, RoHS="RoHS Compliant", Shielding=Shielded, Size / Dimension="0.402\" L x 0.394\" W (10.20mm x 10.00mm)", Stock 1=3849, Supplier 1=Digi-Key, Supplier Device Package=-, Type=-
"Left Motor" "Right Motor": "Header, 2-Pin", LatestRevisionDate=17-Jul-2002, LatestRevisionNote="Re-released for DXP Platform.", Publisher="Altium Limited"
MT1 MT2 MT3: library part MC_M4.2_HOLE, "Fixing M4.2 Mount Hole NPTH", Manufacturer=Hi-Q, Manufacturer PN="4NE Series M4 Clearance", Price=0, Supplier="ECE Dept"
Q1 Q2 Q4 Q7: library part TM_SSM3J328R, "MOSFET P-CH 20V 6A SOT23-3", Case/Package=SOT-23-3, Continuous Drain Current (ID)=6A, Drain to Source Breakdown Voltage=-20V, Drain to Source Resistance=47.4mR, Drain to Source Voltage (Vdss)=20V, Gate to Source Voltage (Vgs)=8V, Input Capacitance=840pF, Input Capacitance (Ciss) @ Vds="840pF @ 10V", Manufacturer=Toshiba, Max Operating Temperature=150°C, Max Power Dissipation=1W, Min Operating Temperature=-55°C, Package / Case="SOT-23-3 Flat Leads", Package Quantity=3000, Power Dissipation=2W, Supplier Device Package=SOT-23F, Supplier Part Number=SSM3J328RLFDKR-ND, ComponentLink1Description=https://datasheet.ciiva.com/11158/ssm3j328r-datasheet-en-20140301-11158652.pdf, ComponentLink1URL=https://datasheet.ciiva.com/11158/ssm3j328r-datasheet-en-20140301-11158652.pdf, Current - Continuous Drain (Id) @ 25° C=6A, Element Configuration=Single, FET Feature="Logic Level Gate, 1.5V Drive", FET Type="MOSFET P-Channel, Metal Oxide", Gate Charge (Qg) @ Vgs="12.8nC @ 4.5V", Manufacturer Part Number=SSM3J328R,LF, Mount="Surface Mount", Number of Channels=1, Number of Elements=1, Number of Pins=3, Packaging="Tape and Reel", Power - Max=1W, Pricing="1=0.79, 10=0.658, 25=0.5772, 100=0.4939, 250=0.42836, 500=0.36284, 1000=0.27972 (NZD)", Radiation Hardening=No, Rds On Max=29.8mR, Storage Location="PCB Assembly WS", Supplier=Digi-Key, Supplier 1=Digi-Key, Supplier Part Number 1=SSM3J328RLFDKR-ND, Turn-Off Delay Time=107ns, Turn-On Delay Time=32ns, Vgs(th) (Max) @ Id="1V @ 1mA"
R1 R2: library part RS_27R, "RES 27 OHM 1/10W 5% 0603 SMD", Storage Location="PCB Assembly WS", Supplier="ECE Dept"
R3: library part RS_27K, "RES 27K OHM 1/10W 5% 0603 SMD", Storage Location="PCB Assembly WS", Supplier="ECE Dept"
R7 R23 R25 R52: library part RS_1K, "RES 1.0K OHM 1/10W 5% 0603 SMD", Storage Location="PCB Assembly WS", Supplier="ECE Dept"
R8 R9: library part RS_4K7, "RES 4.7K OHM 1/10W 5% 0603 SMD", Storage Location="PCB Assembly WS", Supplier="ECE Dept"
R10 R11 R12 R13 R21 R24 R26 R28 R51 R53: library part RS_10K, "RES 10.0K OHM 1/10W 5% 0603 SMD", Storage Location="PCB Assembly WS", Supplier="ECE Dept"
R14 R15 R16 R33: library part RS_100K, "RES 100K OHM 1/10W 5% 0603 SMD", Storage Location="PCB Assembly WS", Supplier="ECE Dept"
R17 R19: library part RS_3K3, "RES 3.3K OHM 1/10W 5% 0603 SMD", Storage Location="PCB Assembly WS", Supplier="ECE Dept"
R18 R20: library part RS_2K, "RES 2K OHM 1/10W 5% 0603 SMD", Storage Location="PCB Assembly WS", Supplier="ECE Dept"
R22 R27 R30 R50: library part RS_0R0, "RES 0.0 OHM 1/10W 5% 0603 SMD", Storage Location="PCB Assembly WS", Supplier="ECE Dept"
R34: library part RS_33K, "RES 33.0K OHM 1/10W 5% 0603 SMD", Storage Location="PCB Assembly WS", Supplier="ECE Dept"
R60: library part RS_47K, "RES 47.0K OHM 1/10W 5% 0603 SMD", Storage Location="PCB Assembly WS", Supplier="ECE Dept"
S1 S2 S4 S5: library part WS_EVQPNF05M, "Panasonic 6 x 3.5mm SMD Light Touch Switch Type SMD", Manufacturer=Panasonic, Supplier Part Number 1=2079481, Manufacturer PN=EVQPNF05M, PackageDescription="6.0 x 3.5 mm", Storage Location="PCB Assembly WS", Supplier="ECE Dept", Supplier 1=Farnell, Supplier 2=Digi-Key, Supplier Part Number 2=P13598SCT-ND
S3: "DIP Switch, 4 Position, SPST SMD", Contact Current DC Max=25, Manufacturer="OMRON ELECTRONIC COMPONENTS", Manufacturer Part Number=A6SN-4101, Supplier Part Number 1=2029425, Contact Configuration=SPST, External Length / Height=12.1, No. of Switch Positions=4, Pitch Spacing=2.54, Storage Location="PCB Assembly WS", Supplier="ECE Dept", Supplier 1=Farnell
T1 T2 T4: library part TM_BSH105, "MOSFET N-CH 20V 1.05A SOT-23", Current - Continuous Drain (Id) @ 25° C=1.05A, Drain to Source Voltage (Vdss)=20V, Input Capacitance (Ciss) @ Vds="152pF @ 16V", Manufacturer="NXP Semiconductors", Package / Case="TO-236-3, SC-59, SOT-23-3", Power - Max=417mW, Supplier Part Number 1=1758066, FET Type="MOSFET N-Channel, Metal Oxide", Gate Charge (Qg) @ Vgs="3.9nC @ 4.5V", Manufacturer Part Number=BSH105,215, Pricing="1=0.53, 10=0.42, 25=0.3544, 100=0.2885, 250=0.23896, 500=0.1974, 1000=0.14785 (NZD)", Rds On (Max) @ Id, Vgs="200 mOhm @ 600mA, 4.5V", Storage Location="PCB Assembly WS", Supplier="ECE Dept", Supplier 1=Farnell, Supplier 2=Digi-Key, Supplier Part Number 2=568-6215-1-ND
U1 U9: library part SV_CAT6219-330TDGT3, "IC REG LIN 3.3V 500MA TSOT23-5", Base Part Number=CAT6219, Current - Output=500mA, Package / Case="SOT-23-5 Thin, TSOT-23-5", Supplier Device Package=TSOT-23-5, Supplier Part Number=CAT6219-330TDGT3CT-ND, Voltage - Input (Max)=5.5V, Voltage - Output (Min/Fixed)=3.3V, Voltage Dropout (Max)="0.5V @ 500mA", ComponentLink1Description=http://www.onsemi.com/pub/Collateral/CAT6219-D.PDF, ComponentLink1URL=http://www.onsemi.com/pub/Collateral/CAT6219-D.PDF, ComponentLink2Description="CAT6219 Datasheet", ComponentLink2URL=\\maxwell\elecapp\AltiumDesigner\Libraries\DatasheetsNew\ENCE461\CAT6219-D.PDF, Manufacturer Part Number=CAT6219-330TDGT3, Supplier=Digi-Key, Supplier 1=Digi-Key
U2: "Accelerometer 3-Axis, +/-2 g / +/-4 g / +/-8 g / +/-16 g with Digital Output, 1.6 KHz BW, Industrial, 14-pin LGA, Tray", Manufacturer="Analog Devices", Supply Current="140 uA", Voltage Supply (V)="2.0 to 3.6", # of Axes=3, -3dB Bandwidth="1.6 KHz", ComponentLink1Description="Manufacturer URL", ComponentLink1URL=http://www.analog.com/en/index.html, ComponentLink2Description=Datasheet, ComponentLink2URL=http://www.analog.com/static/imported-files/data_sheets/ADXL345.pdf, ComponentLink3Description="Package Specification", ComponentLink3URL=http://www.analog.com/static/imported-files/data_sheets/ADXL343.pdf, ComponentLink4Description="Product URL", ComponentLink4URL=http://www.analog.com/en/mems-sensors/mems-inertial-sensors/adxl345/products/product.html, DatasheetVersion="Rev. D", Manufacturer 1="Analog Devices", Manufacturer Part Number 1=ADXL345BCCZ, Mounting Technology="Surface Mount", Output Type=Digital, PackageDescription="14-Pin Land Grid Array, 3 x 5 mm Body, 0.8 mm Pitch", PackageReference=CC-14-1, PackageVersion="03-16-2010-A, 03/2010", Packing=Tray, PartNumber=ADXL345BCCZ, Sensitivity="256/128/64/32 LSB/g"
U3: library part SE_ATSAM4S16BA-MU, "IC MCU 32BIT 512KB FLASH 64LQFP", Manufacturer=Atmel, Package / Case=64-LQFP, Supplier Part Number 1=ATSAM4S8BA-ANRCT-ND, Voltage - Supply (Vcc/Vdd)="1.62 V ~ 3.6 V", Code_JEDEC=MO-220VMMD-3, ComponentLink1Description="Manufacturer URL", ComponentLink1URL=http://www.atmel.com/, ComponentLink2Description="SAM4S Series Datasheet", ComponentLink2URL=http://www.atmel.com/dyn/resources/prod_documents/11100.pdf, ComponentLink3Description="SAM4S Series Summary", ComponentLink3URL=http://www.atmel.com/dyn/resources/prod_documents/11100S.pdf, Connectivity="I²C, IrDA, Memory Card, SPI, SSC, UART/USART, USB", Core Processor="ARM® Cortex®-M4", Core Size=32-Bit, Data Converters="A/D 11x12b, D/A 2x12b", Manufacturer Part Number=ATSAM4S8BA-ANR, Number of I/O=47, PackageDescription="64-Pin Quad Flat No-Lead (QFN) Sawn, 9 x 9 x 1.0 mm Body, 0.5 mm Pitch, Exposed Pad", PackageReference=64PS, PackageVersion="revJ, Jul-2007", Packaging="Cut Tape (CT)", Peripherals="Brown-out Detect/Reset, DMA, POR, PWM, WDT", Program Memory Size="512KB (512K x 8)", Program Memory Type=FLASH, RAM Size="128K x 8", Speed=120MHz, Supplier 1=Digi-Key
U6: "Dual H-Bridge Motor Driver 1.5A", ComponentLink1Description="DRV8833 Datasheet", ComponentLink1URL=\\maxwell\elecapp\AltiumDesigner\Libraries\DatasheetsNew\ENCE461\drv8833pwpr.pdf
U7: library part ADP2302ARDZ-5.0-R7, "IC REG BUCK 5V 2A 8SOIC", Current - Output=2A, Frequency - Switching=700kHz, Supplier Part Number 1=ADP2302ARDZ-5.0-R7CT-ND, Voltage - Input (Max)=20V, Voltage - Output (Min/Fixed)=5V, ComponentLink1Description="ADP2302ARDZ-5.0 Datasheet", ComponentLink1URL=\\maxwell\elecapp\AltiumDesigner\Libraries\DatasheetsNew\ENCE461\ADP2302_2303.pdf, Manufacturer_Part_Number=ADP2302ARDZ-5.0-R7, Output Type=Fixed, Supplier 1=Digi-Key, Type=DEV, Vendor="Analog Devices Inc"
U8: library part NRF24, "nRF24 SMD Module", Warning="No power planes near or under device"
U10: "1.8V - 5V level converter"
VTX: "Header, 4-Pin", LatestRevisionDate=17-Jul-2002, LatestRevisionNote="Re-released for DXP Platform.", Publisher="Altium Limited"
Y1: library part XT_CRYSTAL_12MHz_18pF, "CRYSTAL 12MHZ 18PF 6X3.5mm SMD", ESR (Equivalent Series Resistance)="60 Ohm", Frequency Stability=±50ppm, Frequency Tolerance=±30ppm, Load Capacitance=18pF, Manufacturer="CTS-Frequency Controls", Manufacturer Part Number=406C35D12M00000, Operating Mode=Fundamental, Operating Temperature="-20°C ~ 70°C", Package / Case="4-SMD, No Lead (DFN, LCC)", Supplier Part Number 1=CTX855CT-ND, Frequency=12MHz, Height="0.047\" (1.20mm)", Mounting Type="Surface Mount", Size / Dimension="0.236\" L x 0.138\" W (6.00mm x 3.50mm)", Supplier 1=Digi-Key
?: library part JA_HDR_IDC_5X2_VERT, "IDC Header, 2,54mm, 10-Pin, Vert", Supplier Part Number 1=1096985, Storage Location="ECE Dept Store", Supplier="ECE Dept", Supplier 1=Farnell

## Via types
v1: diameter 1.27, hole 0.711, Top Layer to Bottom Layer, 158 vias
v2: diameter 1, hole 0.5, Top Layer to Bottom Layer, 10 vias
v3: diameter 2, hole 1.5, Top Layer to Bottom Layer, 1 vias
v4: diameter 2.2, hole 1.6, Top Layer to Bottom Layer, 1 vias

## Nets (pads, with @x,y where several pads share a name; then routed paths per layer and width w, separated by ;. In a path a pad name is that pad's centre, name@x,y a point inside that pad or via, vN(x,y) a via of type N, cw(c..) or ccw(c..) an arc to the next point about the centre after c; other vN are vias at no path point)
"Battery Monitor": R15.1 R16.2 U3.49 | length 5.1
  Top Layer w0.254: U3.49@37.525,56.25 38.295,56.25 cw(c38.295,55.996) 38.474,56.176 39.092,55.558 R16.2@40.15,54.5 40.15,54.3 R15.1@41.25,53.2
Bumper: H3.1 U3.38 | length 9.8
  Top Layer w0.254: H3.1@28,45.74 28.045,46.438 cw(c28.254,46.295) 28.074,46.474 29.726,48.126 ccw(c29.546,48.305) 29.8,48.305 29.8,52.384 cw(c30.054,52.384) 29.874,52.564 30.75,53.44 U3.38@30.75,54.475
D_N: H1.2 R2.1 | length 16.1
  Top Layer w0.3: R2.1@43.85,58.654 44.45,58.654 45.896,60.1 58.295,60.1 58.395,60 58.8,60 58.85,59.95 H1.2@59.3,59.95
D_P: H1.3 R1.1 | length 15.7
  Top Layer w0.3: R1.1@43.85,60.109 44.45,60.109 44.941,60.6 H1.3@59.3,60.6
"DC1 IN": U3.25 U6.16 | length 63
  Top Layer w0.254: U3.25@26.477,59.748 U3.25@26.475,59.75 27.51,59.75 27.6,59.66 27.6,55.898 23.174,51.473 ccw(c23.354,51.293) 23.1,51.293 23.1,41.405 ccw(c23.354,41.405) 23.174,41.226 30.2,34.2 v1(30.2,20.7) ; v1(43.5,12.4) 43.55,12.35 U6.16@43.55,11.1
  Bottom Layer w0.254: v1(30.2,20.7) 32.7,20.7 41,12.4 v1(43.5,12.4)
"DC1 OUT": U3.16 U6.15 | length 61.7
  Top Layer w0.254: U3.16@28.25,65.525 28.25,64.49 29.296,63.444 29.296,62.564 32.761,59.099 32.761,58.962 36.226,55.497 cw(c36.045,55.319) 36.297,55.35 36.635,52.591 cw(c34.173,52.287) 36.653,52.237 36.512,45.291 cw(c36.258,45.296) 36.509,45.257 36.5,45.2 36.5,43.1 37.8,41.8 37.8,15.525 42.875,10.45 U6.15@43.55,10.45
"DC2 IN": U3.13 U6.9 | length 69
  Top Layer w0.254: U3.13@29.75,65.525 29.75,62.753 33.338,59.164 33.338,59.062 36.926,55.474 cw(c36.745,55.295) 36.999,55.305 37.105,52.395 cw(c34.173,52.287) 37.107,52.284 37.1,45.2 ; 37.1,45.199 37.1,43.95 38.8,42.25 38.8,19.4 v1(45.4,12.8) ; U6.9@43.55,6.55 44.065,6.55 44.087,6.529 44.087,5.313 v1(44.1,5.3)
  Bottom Layer w0.254: v1(44.1,5.3) 45.4,6.6 v1(45.4,12.8)
"DC2 OUT": U3.23 U6.10 | length 73.8
  Top Layer w0.254: U3.23@26.475,60.75 27.49,60.75 28.054,60.186 28.054,55.71 23.6,51.256 23.6,41.805 ccw(c23.854,41.805) 23.674,41.626 31.226,34.074 cw(c31.046,33.895) 31.3,33.895 v1(31.3,8) ; v1(40.9,5) 42.2,6.3 42.2,7 42.4,7.2 U6.10@43.55,7.2
  Bottom Layer w0.254: v1(31.3,8) 32.027,7.885 ccw(c32.066,8.136) 32.134,7.891 cw(c32.2,7.646) 32.2,7.9 36.195,7.9 cw(c36.195,7.646) 36.374,7.826 39.126,5.074 ccw(c39.305,5.254) 39.305,5 v1(40.9,5)
DIP_SW_1: S3.8 U3.9 | length 8.9
  Top Layer w0.254: U3.9@31.75,65.525 31.75,67.77 S3.8@36.48,72.5
DIP_SW_2: S3.7 U3.10 | length 8.1
  Top Layer w0.254: U3.10@31.25,65.525 31.25,69.81 S3.7@33.94,72.5
DIP_SW_3: S3.6 U3.11 | length 7.2
  Top Layer w0.254: U3.11@30.75,65.525 30.75,70.15 31.4,70.8 S3.6@31.4,72.5
DIP_SW_4: S3.5 U3.14 | length 7.1
  Top Layer w0.254: S3.5@28.86,72.51 28.86,66.95 29.25,66.56 U3.14@29.25,65.525
"FPV ENABLE": R51.1 R52.1 U3.47 | length 32.1
  Top Layer w0.254: v1(34.2,48.3) 35.654,51.698 ccw(c35.42,51.798) 35.671,51.754 35.671,51.756 35.741,52.188 ; U3.47@35.25,54.475 35.25,53.35 35.399,53.21 cw(c34.743,52.507) 35.463,53.144 35.524,53.075 cw(c35.334,52.907) 35.561,53.02 ; 35.561,53.02 35.602,52.939 cw(c34.743,52.507) 35.61,52.922 35.622,52.898 cw(c35.393,52.788) 35.63,52.88 35.639,52.856 cw(c34.173,52.287) 35.744,52.217 cw(c35.49,52.23) 35.741,52.188 ; v1(38.5,47.5) 40.851,47.5 ccw(c40.851,49.549) 42.3,48.1 43.356,49.156 cw(c45.152,47.36) 45.055,49.898 45.058,49.898 ccw(c45.047,50.152) 45.069,49.899 v1(46.2,50) ; R51.1@54.95,51.4 55,51.45 55,52.65 R52.1@54.95,52.7 55.031,53.398 v1(55.1,54)
  Bottom Layer w0.254: v1(34.2,48.3) 34.256,48.244 ccw(c36.052,50.04) 36.052,47.5 v1(38.5,47.5) ; v1(46.2,50) v1(55.1,54)